# Altium PCB PCB_st500E.pcbdoc
Units mil, origin at the board's own origin, x right, y up, seen from the top; angles counter-clockwise.
Board outline 2440 x 2003.11 mil, 2 copper layers (Top Layer, Bottom Layer); 19 components, 11 nets, 57 pads, 28 vias.
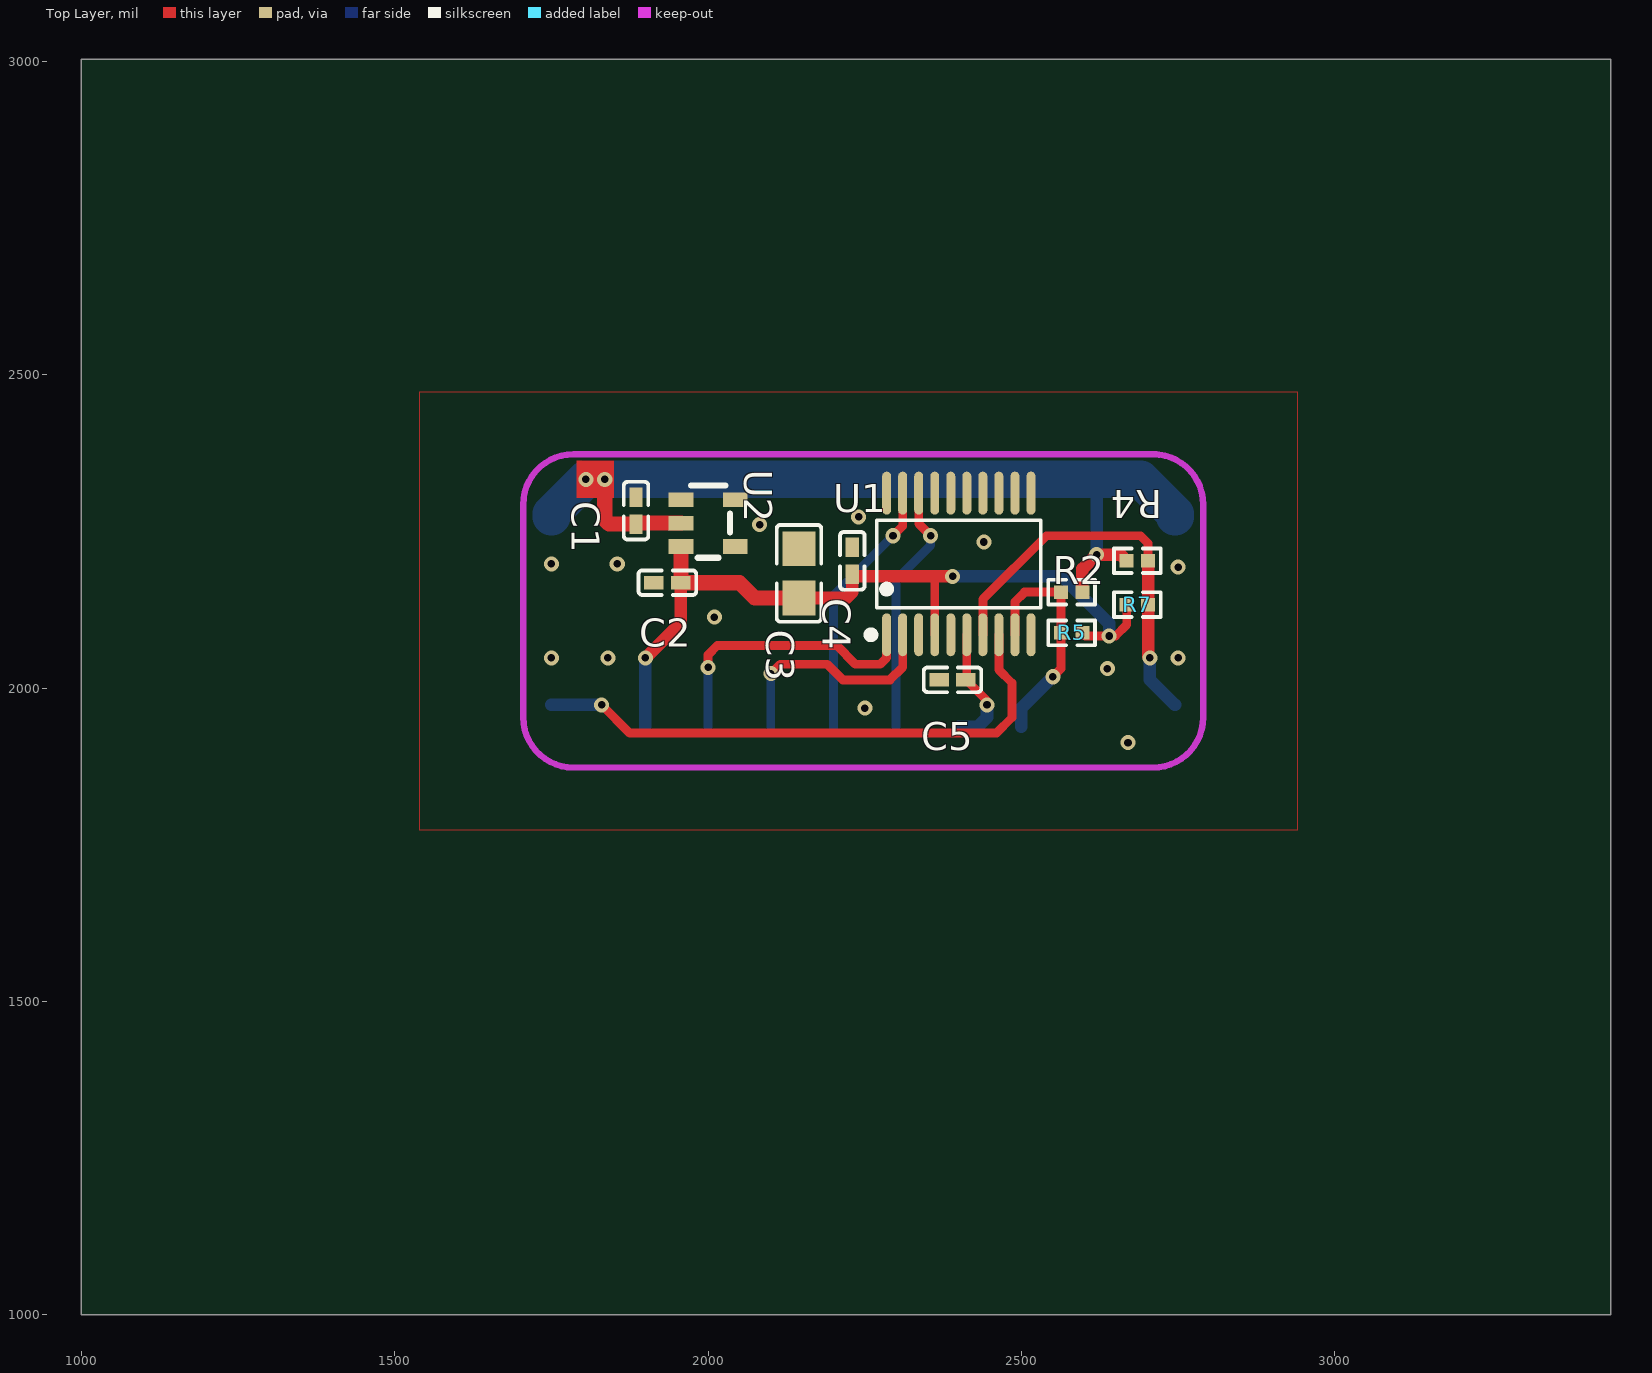
[diagram p0: Top Layer view]
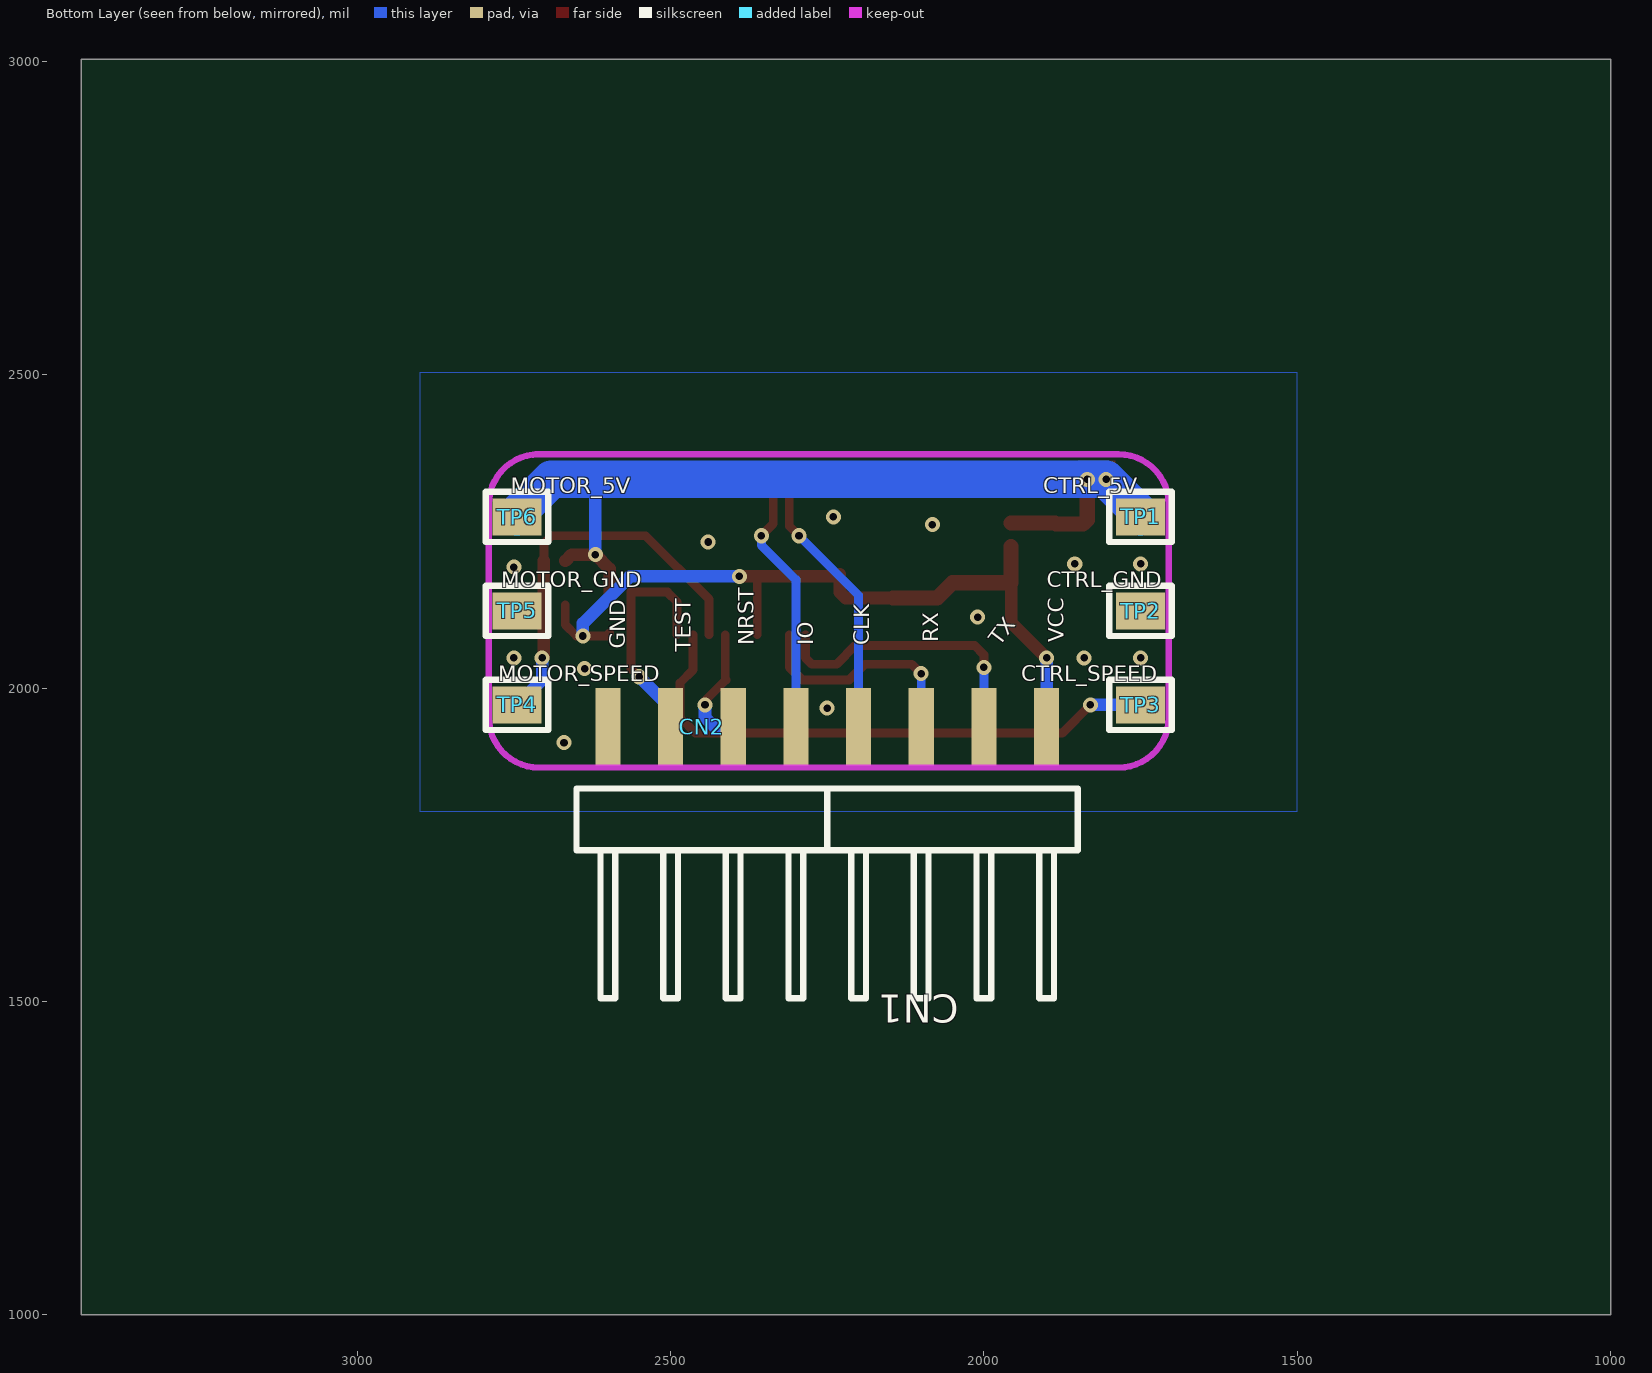
[diagram p1: Bottom Layer view, seen from below]

## Layer stack, top to bottom
Top Layer: signal copper (thickness not stored)
Dielectric: dielectric 12.6, FR-4, Dk 4.8
Bottom Layer: signal copper (thickness not stored)

## Board outline
3440,1000 1000,1000 1000,3003.11 3440,3003.11

## Components (designator, comment, footprint, x,y, rotation, side; value= is the part's Value field where it differs from the comment)
C1 "0.1u" C0402 1885,2283.11 r270 top
C2 "0.47u" C0402 1935,2168.11 r0 top
C3 "4.7uF" C0805 2145,2183.11 r270 top
C4 "0.1u" C0402 2230,2203.11 r270 top
C5 "0.1u" C0402 2390,2013.11 r0 top
CN1 "DEBUG1" CONN-SMD_1125-1104G0Z135CR01 2050,1938.11 r180 bottom
CN2 "DEBUG2" CONN-SMD_1125-1104G0Z135CR01 2450,1938.11 r180 bottom
R2 "4k7" R0402 2580,2153.11 r0 top
R4 "4k7" R0402 2685,2203.11 r180 top
R5 "NC" R0402 2580,2088.11 r0 top
R7 "NC" R0402 2685,2133.11 r180 top
TP1 "CTRL_5V" TESTPOINT-SMD_L1.6-W0.8_RCU-0C 1750,2273.11 r0 bottom
TP2 "CTRL_GND" TESTPOINT-SMD_L1.6-W0.8_RCU-0C 1750,2123.11 r0 bottom
TP3 "CTRL_SPEED" TESTPOINT-SMD_L1.6-W0.8_RCU-0C 1750,1973.11 r0 bottom
TP4 "MOTOR_SPEED" TESTPOINT-SMD_L1.6-W0.8_RCU-0C 2745,1973.11 r0 bottom
TP5 "MOTOR_GND" TESTPOINT-SMD_L1.6-W0.8_RCU-0C 2745,2123.11 r0 bottom
TP6 "MOTOR_5V" TESTPOINT-SMD_L1.6-W0.8_RCU-0C 2745,2273.11 r0 bottom
U1 "STM32G031F6P6" TSSOP-20_L6.5-W4.4-P0.65-LS6.4-BL 2400,2198.11 r0 top
U2 "ST730" SOT-23-5_L2.9-W1.6-P0.95-LS2.8-BL 2000,2263.11 r270 top

## Footprints (in the part's own frame and the unit in brackets; to place one, negate y for a bottom-side part, rotate by r counter-clockwise, add the part's x,y. Pads: shape width x height; smd on the part's side, far side on the other; paste and mask are expansions set on the pad)
C0402 [mm]
  rect 0.79x0.54 smd: 1(-0.545,0) 2(0.545,0)
  silkscreen extent -1.17,-0.5 1.17,0.5
C0805 [mm]
  rect 1.41x1.35 smd: 1(-1,0) 2(1,0)
  silkscreen extent -1.96,-0.9 1.96,0.9
CONN-SMD_1125-1104G0Z135CR01 [mm]
  rect 1.02x3.17 smd: 1(3.81,0) 2(1.27,0) 3(-1.27,0) 4(-3.81,0)
  silkscreen extent -5.08,-11 5.08,-2.5
R0402 [mm]
  rect 0.566x0.54 smd: 1(-0.433,0) 2(0.433,0)
  silkscreen extent -0.94,-0.5 0.94,0.5
SOT-23-5_L2.9-W1.6-P0.95-LS2.8-BL [mm]
  rect 0.6x1 smd: 1(-0.95,-1.1) 2(0,-1.1) 3(0.95,-1.1) 4(0.95,1.1) 5(-0.95,1.1)
  silkscreen extent -1.52,-0.7 1.4,0.89
TESTPOINT-SMD_L1.6-W0.8_RCU-0C [mm]
  rect 2x1.5 smd: 1(0,0)
  silkscreen extent -1.27,-1.02 1.27,1.02
TSSOP-20_L6.5-W4.4-P0.65-LS6.4-BL [mm]
  oval 0.364x1.742 smd: 1(-2.925,-2.871) 2(-2.275,-2.871) 3(-1.625,-2.871) 4(-0.975,-2.871) 5(-0.325,-2.871) 6(0.325,-2.871) 7(0.975,-2.871) 8(1.625,-2.871) 9(2.275,-2.871) 10(2.925,-2.871) 11(2.925,2.871) 12(2.275,2.871) 13(1.625,2.871) 14(0.975,2.871) 15(0.325,2.871) 16(-0.325,2.871) 17(-0.975,2.871) 18(-1.625,2.871) 19(-2.275,2.871) 20(-2.925,2.871)
  silkscreen extent -3.71,-3.02 3.33,1.77

## Via types
v1: diameter 24, hole 12, Top Layer to Bottom Layer, tented both sides, 28 vias

## Nets (pads, with @x,y where several pads share a name; then routed paths per layer and width w, separated by ;. In a path a pad name is that pad's centre, name@x,y a point inside that pad or via, vN(x,y) a via of type N, cw(c..) or ccw(c..) an arc to the next point about the centre after c; other vN are vias at no path point)
+5V: C1.2 R2.2 R4.2 TP1.1 TP6.1 U2.2 | length 1482.2
  Top Layer w20: R2.2 2597.04,2190.15 v1(2620,2213.11) 2657.96,2213.11 R4.2
  Top Layer w24: v1(1835,2333.11) 1835,2268.11 1841.46,2261.65 1885,2261.65 1886.46,2263.11 U2.2
  Bottom Layer w20: v1(2620,2213.11) 2620,2333.01 2620.1,2333.11
  Bottom Layer w60: TP1.1 1750,2278.11 v1(1805,2333.11) 2690,2333.11 2745,2278.11 TP6.1
GND: C1.1 C2.1 C3.1 C4.1 C5.1 CN2.4 TP2.1 TP5.1 U1.5 U2.1
  other v1: 2670,1913.11 2250,1968.11 2637.2,2030.91 1750,2048.11 1840,2048.11 2750,2048.11 2010,2113.11 2750,2193.11 1750,2198.11 1855,2198.11 2440,2233.11 2082.2,2260.91 2082.2,2260.91 2240,2273.11
IN_MOTOR: R4.1 R7.1 TP4.1 U1.7 | length 642.9
  Top Layer w14: U1.7 2438.4,2141.51 2540,2243.11 2690,2243.11 2702,2231.11 R4.1
  Top Layer w20: R7.1 2702,2051.11 v1(2705,2048.11) ; R7.1 R4.1
  Bottom Layer w20: v1(2705,2048.11) 2705,2013.11 TP4.1
MCU_RX: CN1.3 U1.2 | length 372
  Top Layer w14: v1(2100,2023.11) 2115,2038.11 2130,2038.11 2190,2038.11 2215,2013.11 2290,2013.11 2310.4,2033.51 U1.2
  Bottom Layer w14: CN1.3 v1(2100,2023.11)
MCU_TX: CN1.2 U1.1 | length 459.5
  Top Layer w14: v1(2000,2033.11) 2000,2053.11 2015,2068.11 2025,2068.11 2205,2068.11 2235,2038.11 2274.6,2038.11 2284.8,2048.31 U1.1
  Bottom Layer w14: CN1.2 v1(2000,2033.11)
NRST: C5.2 CN2.2 U1.6 | length 197.6
  Top Layer w14: U1.6 2412.8,2014.45 C5.2 2445,1979.57 v1(2445,1973.11)
  Bottom Layer w20: CN2.2 2430,1938.11 2445,1953.11 v1(2445,1973.11)
OUT_CTRL: TP3.1 U1.8 | length 904.7
  Top Layer w14: v1(1830,1973.11) 1875,1928.11 2460,1928.11 2485,1953.11 2485,2008.11 2463.98,2029.13 U1.8
  Bottom Layer w20: TP3.1 v1(1830,1973.11)
SWD_CLK: CN1.4 U1.19 | length 418.8
  Top Layer w14: v1(2295,2243.11) 2310.43,2258.54 U1.19
  Bottom Layer w14: CN1.4 2200,2148.11 v1(2295,2243.11)
SWD_IO: CN2.1 U1.18 | length 403.7
  Top Layer w14: U1.18 2336.02,2262.09 v1(2355,2243.11)
  Bottom Layer w14: CN2.1 2300,2173.11 2355,2228.11 v1(2355,2243.11)
TEST: CN2.3 R2.1 R5.1 U1.9 | length 373.5
  Top Layer w14: U1.9 2489.57,2137.68 2505,2153.11 R2.1 R5.1 2562.96,2031.07 v1(2550,2018.11)
  Bottom Layer w20: CN2.3 2500,1968.11 2510.8,1978.91 v1(2550,2018.11)
VCC: C2.2 C3.2 C4.2 CN1.1 R5.2 R7.2 U1.4 U2.3 | length 1295.1
  Top Layer w14: U1.4 2361.6,2163.11 2361.9,2178.11 ; R5.2 2602,2083.11 2650,2083.11 2668,2101.11 R7.2
  Top Layer w20: v1(1900,2048.11) 1956.46,2104.57 C2.2 ; C3.2 2220.63,2143.74 2230,2153.11 2230,2181.65 2233.54,2178.11 v1(2390,2178.11)
  Top Layer w24: C2.2 U2.3 ; C2.2 2050,2168.11 2074.37,2143.74 C3.2
  Bottom Layer w20: CN1.1 v1(1900,2048.11) ; v1(2390,2178.11) 2565,2178.11 2640,2103.11 v1(2640,2083.11)
pads on no net: U1.3 U1.10 U1.11 U1.12 U1.13 U1.14 U1.15 U1.16 U1.17 U1.20 U2.4 U2.5

## Polygon pours and split planes (outlines as drawn)
GND on Top Layer (solid): 1540,2473.11 2940,2473.11 2940,1773.11 1540,1773.11
GND on Bottom Layer (solid): 1500,2503.11 2900,2503.11 2900,1803.11 1500,1803.11

## Keep-outs
Keep-Out Layer:
  lines w10: 1705,1953.11 ccw(c1785,1953.11) 1785,1873.11 ; 1705,2293.11 cw(c1785,2293.11) 1785,2373.11 ; 2710,1873.11 ccw(c2710,1953.11) 2790,1953.11 ; 2710,2373.11 cw(c2710,2293.11) 2790,2293.11

## Other copper
Top Layer:
  rectangle net +5V: 1790,2303.11 1850,2363.11

## Silkscreen, mask and mechanical layers (free items; w line width, h text height)
Bottom Overlay:
  text "VCC" at 1872.5,2073.11 h25 r270
  text "RX" at 2072.5,2073.11 h25 r270
  text "CLK" at 2182.5,2068.11 h25 r270
  text "IO" at 2272.5,2068.11 h25 r270
  text "NRST" at 2367.5,2068.11 h25 r270
  text "TX" at 1975.02,2065.59 h25 r307
  text "GND" at 2572.5,2063.11 h25 r270
  text "TEST" at 2467.5,2058.11 h25 r270